# Altium PCB hazi_kiindulas.PcbDoc
Units mil, origin at the board's own origin, x right, y up, seen from the top; angles counter-clockwise.
Board outline 3628.74 x 2378.74 mil, 2 copper layers (Top Layer, Bottom Layer); 33 components, 42 nets, 239 pads, 45 vias.
Unrouted connection lines stored in the file: 1.
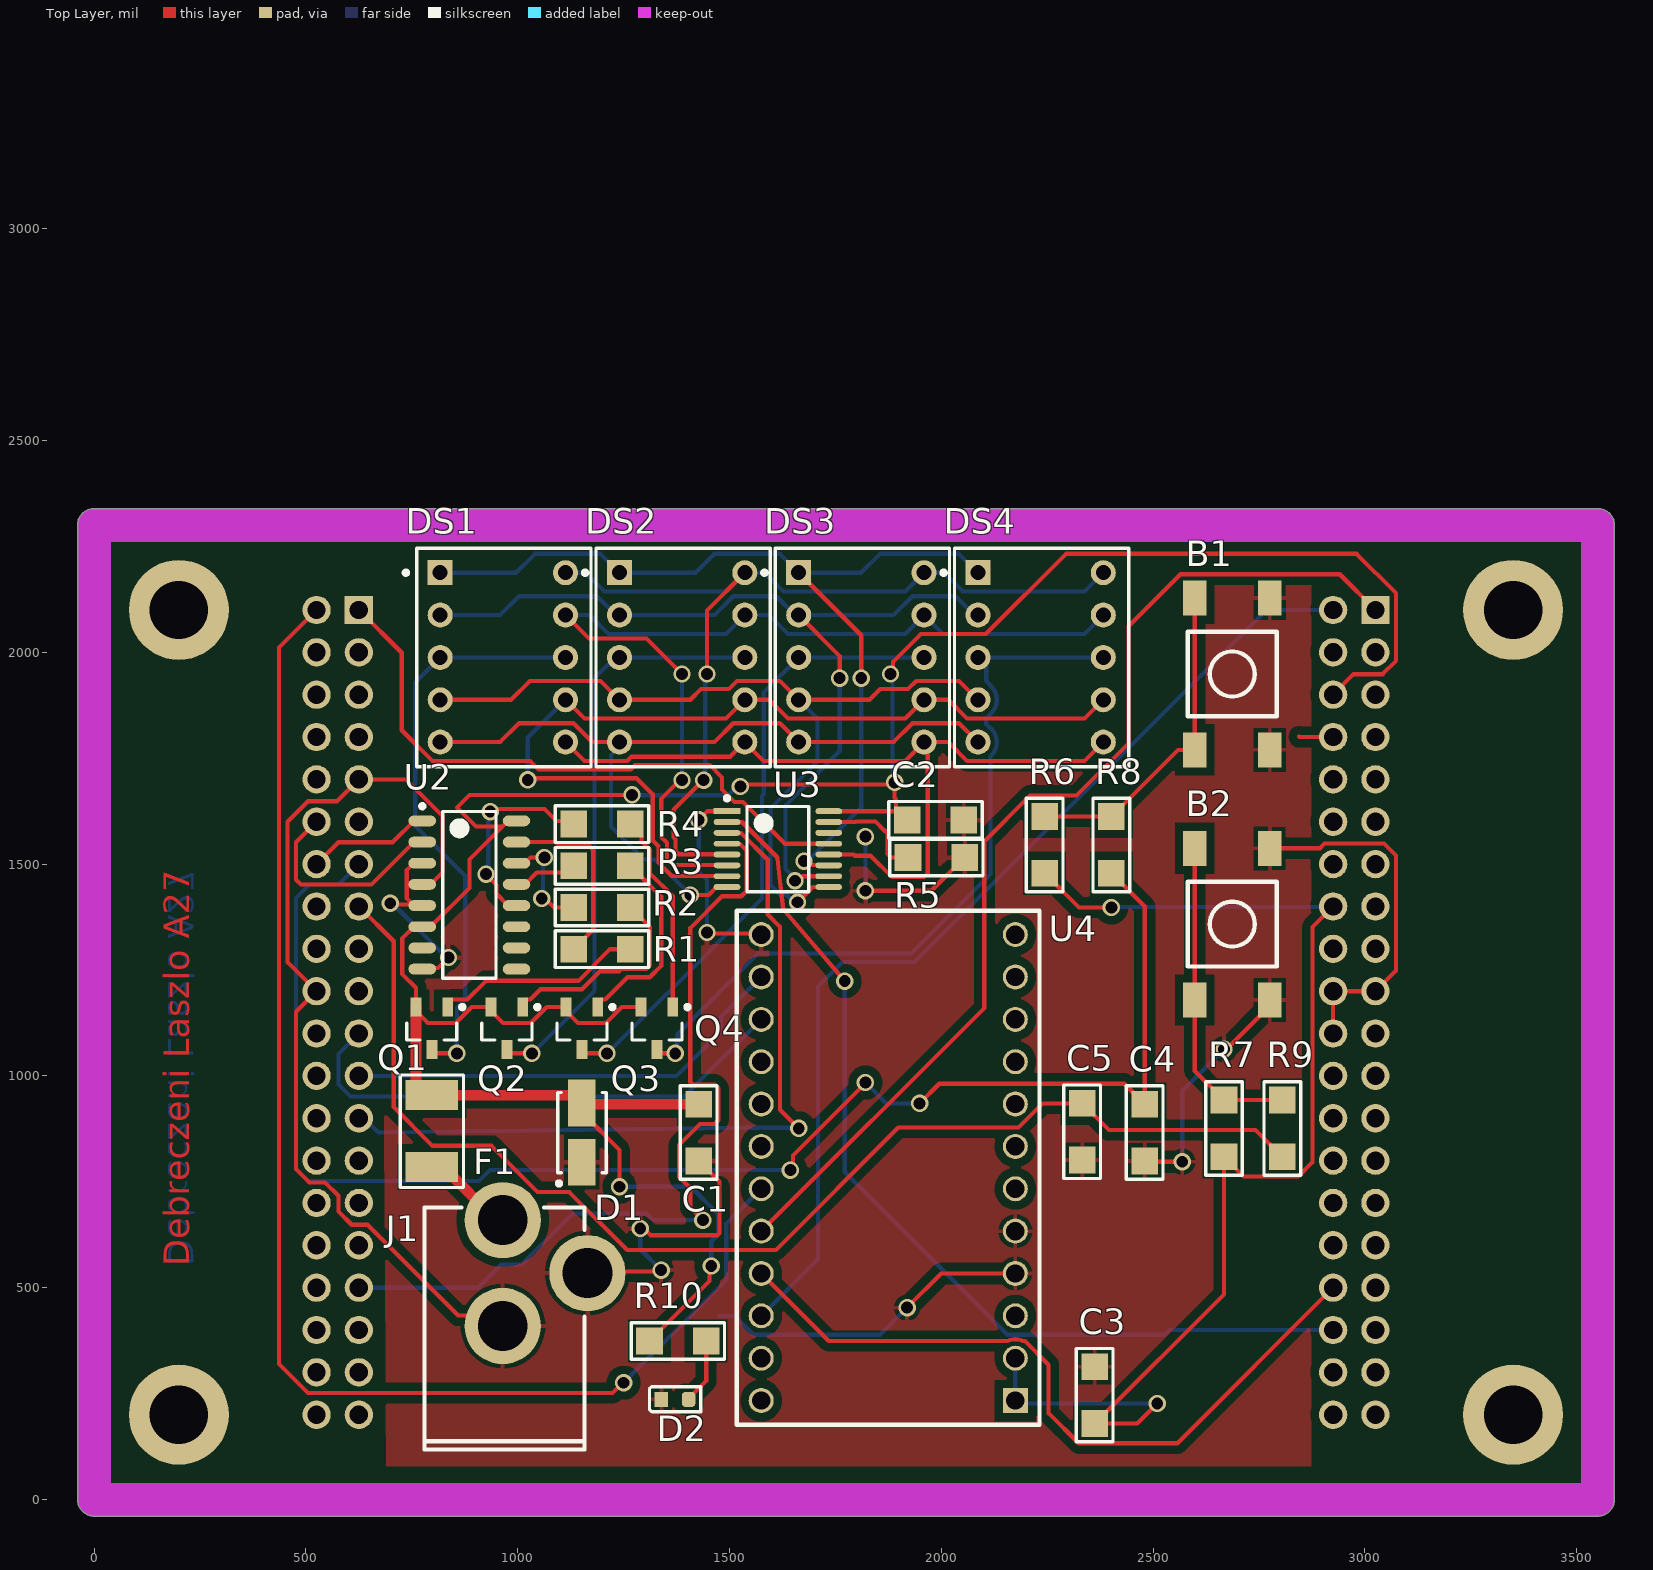
[diagram p0: Top Layer view]
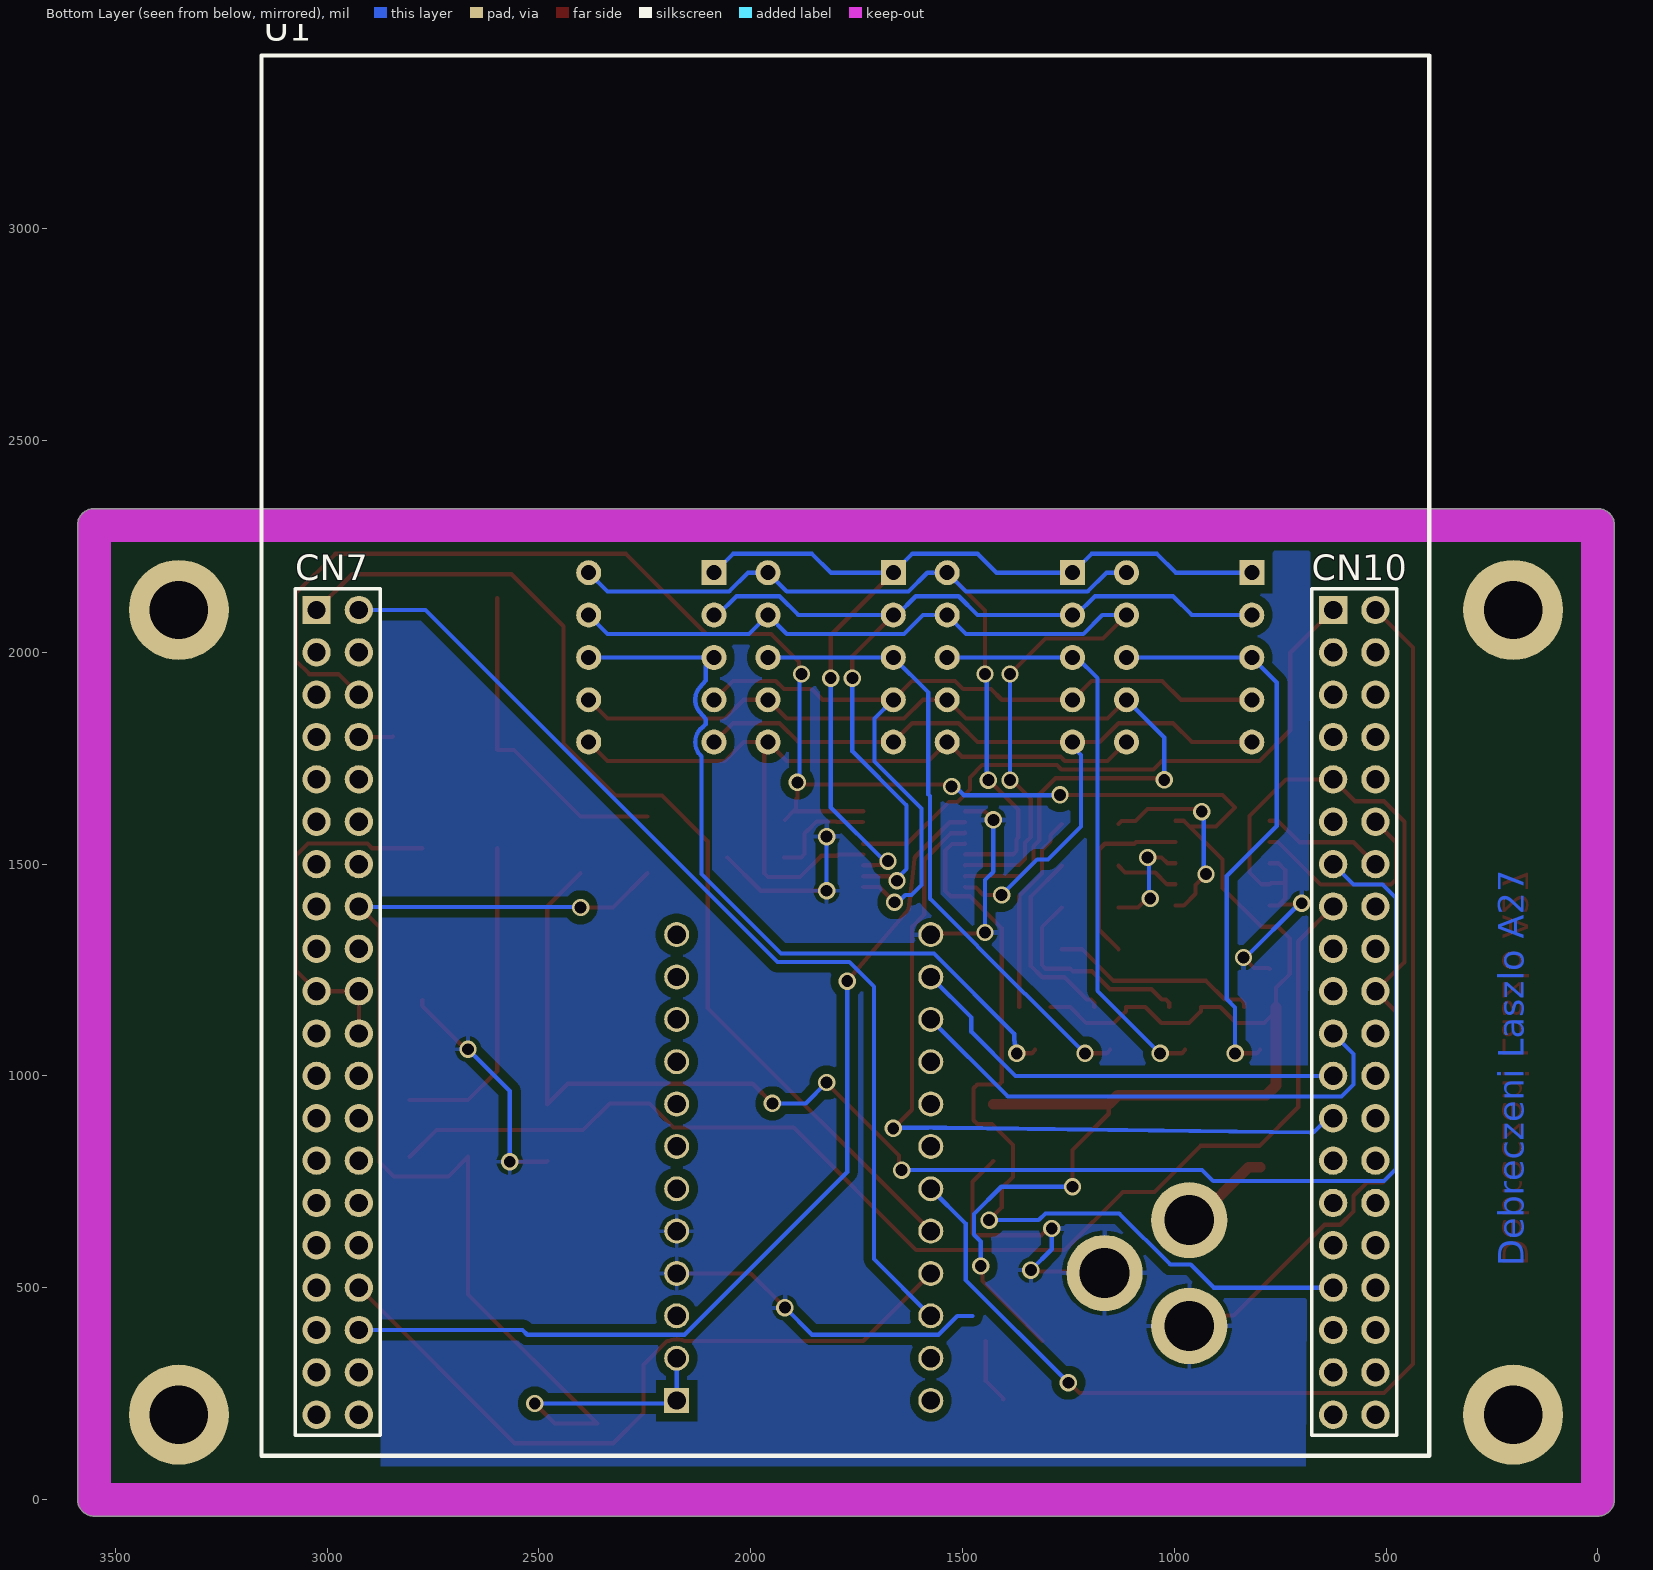
[diagram p1: Bottom Layer view, seen from below]
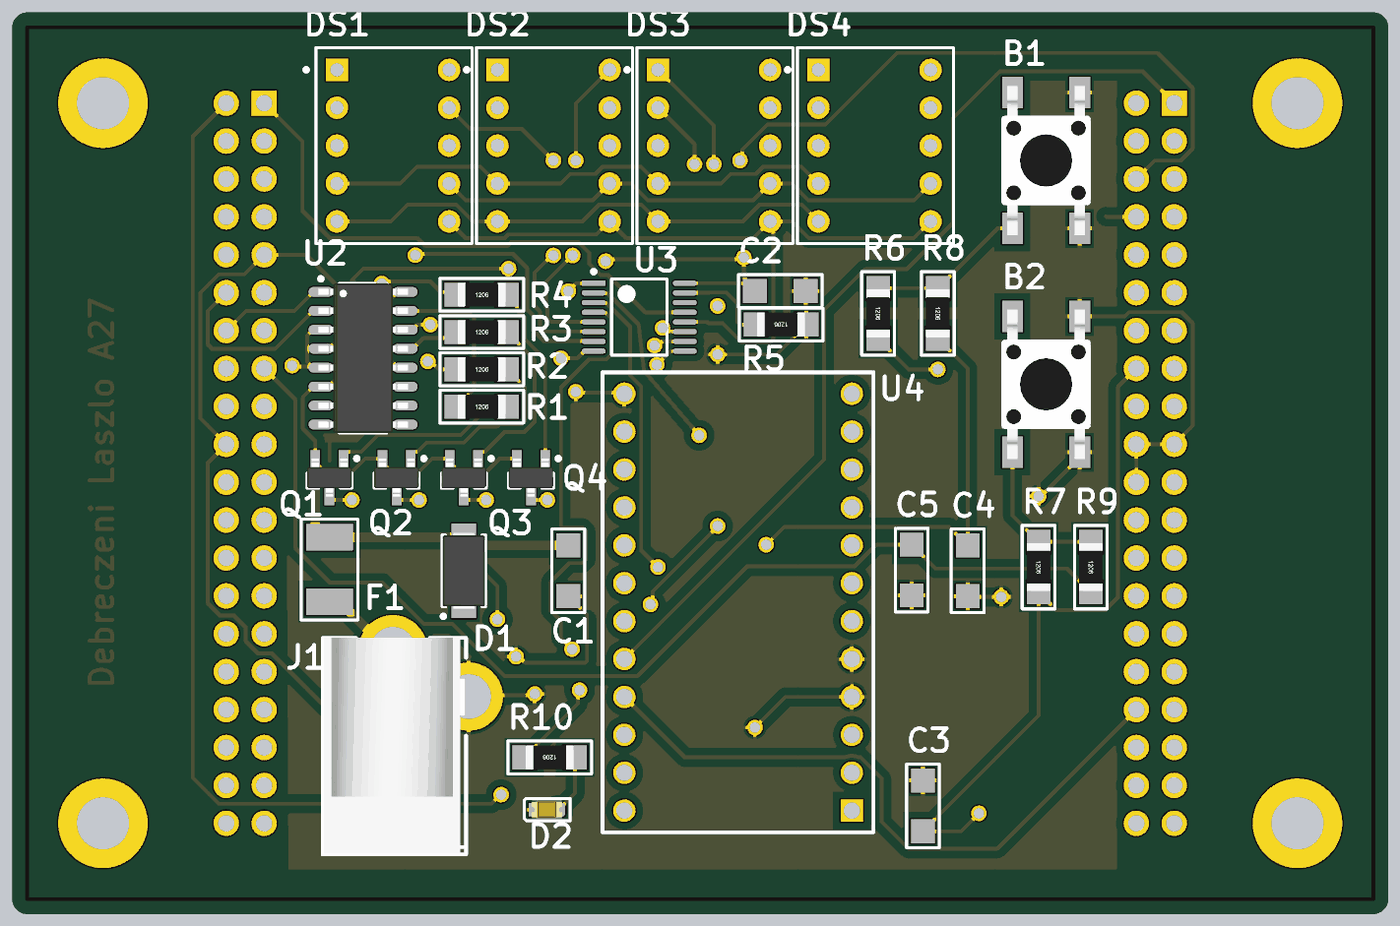
[diagram p2: 3D render of the assembled board from above, using the file's embedded part models]

## Layer stack, top to bottom
Top Solder: solder mask 0.4, Solder Resist, Dk 3.5
Top Layer: signal copper 1.4
Dielectric 1: dielectric 12.6, FR-4, Dk 4.8
Bottom Layer: signal copper 1.4
Bottom Solder: solder mask 0.4, Solder Resist, Dk 3.5

## Board outline
-39.37,2300 cw(c0,2300) 0,2339.37 3550,2339.37 cw(c3550,2300) 3589.37,2300 3589.37,0 cw(c3550,0) 3550,-39.37 0,-39.37 cw(c0,0) -39.37,0

## Design rules (kind name [scope] priority, off if disabled: settings)
Clearance [All] p1: gap=10 ignorepadtopadclearanceinfootprint=FALSE except(20: Arc-Poly Track-Poly SMDPad-Poly THPad-Poly Via-Poly Fill-Poly Poly-Poly)
HoleSize [IsVia] p1: absolutevalues=TRUE maxlimit=196.85 minlimit=28 maxpercent=80.000 minpercent=20.000
PolygonConnect [All] p1: connectstyle=Relief reliefconductorwidth=10 reliefentries=4 polygonreliefangle="90 Angle" airgapwidth=10
RoutingVias [All] p1: holewidth=28 width=41 viastyle="Through Hole" minholewidth=28 minwidth=41 maxholewidth=28 maxwidth=41
SolderMaskExpansion [All] p1: expansion=4 istentingtop=FALSE
UnRoutedNet [All] p1: checkbadconnections=TRUE
Width [All] p1: maxlimit=100 minlimit=10 preferedwidth=10
28 further rules are at their usual default settings.

## Classes and differential pairs
component class Pushbuttons: B1 B2 C4 C5 R6 R7 R8 R9
component class Power: D1 D2 F1 J1 R10
component class Acceleration_module: C3 U4
component class 7segment: C1 C2 DS1 DS2 DS3 DS4 Q1 Q2 Q3 Q4 R1 R2 R3 R4 R5 U2 U3
component class Nucleo: U1

## Components (designator, comment, footprint, x,y, rotation, side; value= is the part's Value field where it differs from the comment)
B1 "Button" FP_BTN_SMD 2687.01,1948.82 r0 top
B2 "Button" FP_BTN_SMD 2687.01,1358.27 r0 top
C1 "100nF" FP_1206_CAP_125 1427.17,866.14 r90 top
C2 "100nF" FP_1206_CAP_125 1986.22,1604.33 r180 top
C3 "100nF" FP_1206_CAP_125 2362.2,246.06 r270 top
C4 "100nF" FP_1206_CAP_125 2480.31,866.14 r90 top
C5 "100nF" FP_1206_CAP_125 2332.68,868.11 r90 top
D1 "Unidir suppressor diode" DIOM4426X23M 1151.57,866.14 r90 top
D2 "LED" FP_0805_LED_RED 1371.06,236.22 r180 top
DS1 "7SEG Red-CA" FP_7SEG 964.57,1988.19 r0 top
DS2 "7SEG Red-CA" FP_7SEG 1387.8,1988.19 r0 top
DS3 "7SEG Red-CA" FP_7SEG 1811.02,1988.19 r0 top
DS4 "7SEG Red-CA" FP_7SEG 2234.25,1988.19 r0 top
F1 "Fuse" FP_MULTIFUSE 797.24,784.72 r90 top
J1 "2.xmm" FP_DC_TAP_ANYA 964.57,659.45 r180 top
Q1 "BC807-25" SOT95P240X115-3M 797.24,1112.2 r270 top
Q2 "BC807-25" SOT95P240X115-3M 974.41,1112.2 r270 top
Q3 "BC807-25" SOT95P240X115-3M 1151.57,1112.2 r270 top
Q4 "BC807-25" SOT95P240X115-3M 1328.74,1112.2 r270 top
R1 "10K" FP_1206_RES 1198.82,1299.21 r0 top
R2 "10K" FP_1206_RES 1198.82,1397.64 r0 top
R3 "10K" FP_1206_RES 1198.82,1496.06 r0 top
R4 "10K" FP_1206_RES 1198.82,1594.49 r0 top
R5 "1K" FP_1206_RES 1988.19,1515.75 r180 top
R6 "100K" FP_1206_RES 2244.09,1545.28 r270 top
R7 "100K" FP_1206_RES 2667.32,875.98 r270 top
R8 "10K" FP_1206_RES 2401.57,1545.28 r270 top
R9 "10K" FP_1206_RES 2805.12,875.98 r270 top
R10 "510R" FP_1206_RES 1377.95,374.02 r180 top
U1 "NUCLEO-F446RE" FP_NUCLEO-64 3025,2100 r180 bottom locked
U2 "SN74HCT138DR" SOIC127P600X175-16M 885.83,1427.17 r0 top
U3 "STP08CP05TTR" TSOP65P640X120-16M 1614.17,1535.43 r0 top
U4 "MKI160V1" FP_DIL24 2174.8,233.46 r0 top

## Footprints (in the part's own frame and the unit in brackets; to place one, negate y for a bottom-side part, rotate by r counter-clockwise, add the part's x,y. Pads: shape width x height; smd on the part's side, far side on the other; paste and mask are expansions set on the pad)
DIOM4426X23M [mm] "Molded Diode, 2-Leads, Body 4,40x2,62mm, IPC Low Density"
  rect 2.8x1.65 smd: 1(-1.775,0) 2(1.775,0)
  silkscreen extent -3.17,-1.45 2.4,1.5, body extent -2.6,-1.42 2.6,1.42, height 2.3
FP_7SEG [mm] "LED, 7-Segment Display, 7.62 mm, RHD; 10 Leads; Row Space 5.08 mm; Pitch 2.54 mm"
  rect 1.5x1.5 hole 0.9: 1(-3.75,5.075)
  round 1.5 hole 0.9: 2(-3.75,2.535) 3(-3.75,-0.005) 4(-3.75,-2.545) 5(-3.75,-5.085) 6(3.765,-5.085) 7(3.765,-2.545) 8(3.765,-0.005) 9(3.765,2.535) 10(3.765,5.075)
  silkscreen extent -5.93,-6.56 5.29,6.54, body extent -5.16,-6.56 5.29,6.54, height 6.34
FP_0805_LED_RED [mm] "0805 méretű piros LED"
  rrect50% 0.8x0.9 smd: A(-0.825,0)
  rect 0.8x0.9 smd: K(0.825,0)
  silkscreen extent -1.55,-0.75 1.53,0.75, body extent -1,-0.62 1.02,0.62, height 1.1
FP_1206_CAP_125 [mm] "1206 kapacitás 1.25 mm"
  rect 1.6x1.6 smd: 1(-1.7,0) 2(1.7,0)
  silkscreen extent -2.8,-1.1 2.8,1.1, body extent -1.52,-0.79 1.58,0.79, height 1.25
FP_1206_RES [mm] "1206 ellenállás"
  rect 1.6x1.6 smd: 1(-1.7,0) 2(1.7,0)
  silkscreen extent -2.8,-1.1 2.8,1.1, body extent -1.6,-0.8 1.6,0.8, height 0.62
FP_BTN_SMD [mm] "SMD Push Button 6x6mm"
  rect 1.4x2.1 smd: 1(2.25,4.55) 2(2.25,-4.55) 3(-2.25,4.55) 4(-2.25,-4.55)
  silkscreen extent -2.67,-2.54 2.67,2.54, body extent -3,-5 3,5, height 5.1
FP_DC_TAP_ANYA [mil] "DC HEBA25 TÁPFESZÜLTSÉG ALJZAT ZÁRT, NYÁKBA 90°"
  round 180 hole 118: 1(0,0) 2(0,250) 3(-200,125)
  silkscreen extent -193,-30 185,541, body extent -190,-31 183,539, height 440
FP_DIL24 [mm] "DIL24"
  rect 1.5x1.5 hole 1.1: 1(0,0)
  round 1.5 hole 1.1: 2(0,2.54) 3(0,5.08) 4(0,7.62) 5(0,10.16) 6(0,12.7) 7(0,15.24) 8(0,17.78) 9(0,20.32) 10(0,22.86) 11(0,25.4) 12(0,27.94) 13(-15.24,27.94) 14(-15.24,25.4) 15(-15.24,22.86) 16(-15.24,20.32) 17(-15.24,17.78) 18(-15.24,15.24) 19(-15.24,12.7) 20(-15.24,10.16) 21(-15.24,7.62) 22(-15.24,5.08) 23(-15.24,2.54) 24(-15.24,0)
  silkscreen extent -16.7,-1.45 1.45,29.38, body extent -16.52,-1.28 1.28,29.21, height 4.86
FP_MULTIFUSE [mm] "POLYFUSE SMD 1812"
  rect 1.78x3.15 smd: 1(0,0) 2(4.318,0)
  silkscreen extent -1.22,-1.9 5.53,1.9, body extent -0.12,-1.71 4.57,1.71, height 1
FP_NUCLEO-64 [mm]
  round 1.7 hole 1.1: 0(0,-48.26) 0(2.54,-48.26) 0(60.96,-48.26) 0(63.5,-48.26) 2(2.54,0) 3(0,-2.54) 4(2.54,-2.54) 5(0,-5.08) 6(2.54,-5.08) 7(0,-7.62) 8(2.54,-7.62) 9(0,-10.16) 10(2.54,-10.16) 11(0,-12.7) 12(2.54,-12.7) 13(0,-15.24) 14(2.54,-15.24) 15(0,-17.78) 16(2.54,-17.78) 17(0,-20.32) 18(2.54,-20.32) 19(0,-22.86) 20(2.54,-22.86) 21(0,-25.4) 22(2.54,-25.4) 23(0,-27.94) 24(2.54,-27.94) 25(0,-30.48) 26(2.54,-30.48) 27(0,-33.02) 28(2.54,-33.02) 29(0,-35.56) 30(2.54,-35.56) 31(0,-38.1) 32(2.54,-38.1) 33(0,-40.64) 34(2.54,-40.64) 35(0,-43.18) 36(2.54,-43.18) 37(0,-45.72) 38(2.54,-45.72) 40(63.5,0) 41(60.96,-2.54) 42(63.5,-2.54) 43(60.96,-5.08) 44(63.5,-5.08) 45(60.96,-7.62) 46(63.5,-7.62) 47(60.96,-10.16) 48(63.5,-10.16) 49(60.96,-12.7) 50(63.5,-12.7) 51(60.96,-15.24) 52(63.5,-15.24) 53(60.96,-17.78) 54(63.5,-17.78) 55(60.96,-20.32) 56(63.5,-20.32) 57(60.96,-22.86) 58(63.5,-22.86) 59(60.96,-25.4) 60(63.5,-25.4) 61(60.96,-27.94) 62(63.5,-27.94) 63(60.96,-30.48) 64(63.5,-30.48) 65(60.96,-33.02) 66(63.5,-33.02) 67(60.96,-35.56) 68(63.5,-35.56) 69(60.96,-38.1) 70(63.5,-38.1) 71(60.96,-40.64) 72(63.5,-40.64) 73(60.96,-43.18) 74(63.5,-43.18) 75(60.96,-45.72) 76(63.5,-45.72)
  rect 1.7x1.7 hole 1.1: 1(0,0) 39(60.96,0)
  silkscreen extent -3.3,-50.72 66.72,33.25, body extent -3.3,-50.72 66.72,33.25, height 11
SOIC127P600X175-16M [mm] "SOIC, 16-Leads, Body 9,90x3,90mm, Pitch 1,27mm, IPC Low Density"
  oval 1.65x0.65 smd: 1(-2.825,4.445) 2(-2.825,3.175) 3(-2.825,1.905) 4(-2.825,0.635) 5(-2.825,-0.635) 6(-2.825,-1.905) 7(-2.825,-3.175) 8(-2.825,-4.445) 9(2.825,-4.445) 10(2.825,-3.175) 11(2.825,-1.905) 12(2.825,-0.635) 13(2.825,0.635) 14(2.825,1.905) 15(2.825,3.175) 16(2.825,4.445)
  silkscreen extent -2.95,-5 1.6,5.44, body extent -3,-5 3,5, height 1.75
SOT95P240X115-3M [mm] "SOT23, 3-Leads, Body 2,90x2,40mm, Pitch 0,95mm, IPC Low Density"
  rect 1.15x0.65 smd: 1(-1.275,0.95) 2(-1.275,-0.95) 3(1.275,0)
  silkscreen extent -1.4,-1.5 0.7,1.95, body extent -1.28,-1.5 1.28,1.5, height 1.15
TSOP65P640X120-16M [mm] "TSOP, 16-Leads, Body 5,00x4,40mm, Pitch 0,65mm, IPC Low Density"
  rect 1.6x0.35 smd: 1(-3.05,2.275)
  oval 1.6x0.35 smd: 2(-3.05,1.625) 3(-3.05,0.975) 4(-3.05,0.325) 5(-3.05,-0.325) 6(-3.05,-0.975) 7(-3.05,-1.625) 8(-3.05,-2.275) 9(3.05,-2.275) 10(3.05,-1.625) 11(3.05,-0.975) 12(3.05,-0.325) 13(3.05,0.325) 14(3.05,0.975) 15(3.05,1.625) 16(3.05,2.275)
  silkscreen extent -3.17,-2.55 1.85,3.17, body extent -2.25,-2.55 2.25,2.55, height 1.2

## Part data
B1 B2: library part "Button 4P", "Push button", Name="4P Pushbutton", Reference=45-05-43, Supplier=Lomex
C1 C2 C3 C4 C5: library part CAP, "Capacitor", Tolerance=10%, Voltage=50V, Name="100nF 1206 Capacitor", Reference=82-14-64, Supplier=Lomex
D1: library part "Suppressor diode", "Suppressor diode for transients", Name="Suppressor diode", Reference=96-03-85, Supplier=Lomex
D2: "Typical RED GaAs LED", I_max="30 mA", Name="Green LED", Reference=95-02-77, Supplier=Lomex, U_fw="5 V"
DS1 DS2 DS3 DS4: "7-Segment Display: CA, RH DP", Colour="High Efficiency Red (HER)", ComponentLink1Description="Manufacturer Link", ComponentLink1URL=http://www.agilent.com/, DatasheetVersion=19-Feb-2002, LatestRevisionDate=17-Dec-2003, LatestRevisionNote="Schematic revised, PCB Footprint replaced.", MinimumIntensity="360 ucd", Name=FYS-3911BUHR-21, Note="IF = 5 mA", PackageDescription="LED, 7-Segment Display, 7.62 mm, RHD; 10 Leads; Row Space 5.08 mm; Pitch 2.54 mm", PackageReference=A, PackageVersion=11-Feb-2002, Published=8-Jun-2000, Publisher="Altium Limited", Reference=35-03-94, Supplier=Lomex
J1: library part DC_TAP_ANYA, "2.xmm DC HEBA25 TÁPFESZÜLTSÉG ALJZAT ZÁRT, NYÁKBA 90°", Name="TÁP DC ANYA 5.5/2.1/9.5mm DCS-5521-5", Reference=43-07-67, Supplier=Lomex
Q1 Q2 Q3 Q4: "PNP General-purpose Transistor", Name=BC807-25, Reference=86-05-63, Supplier=Lomex
R1 R2 R3 R4 R5 R6 R7 R8 R9 R10: library part RES, "Resistor", Power=0.25W, Tolerance=5%, Supplier=Lomex
  R1 R2 R3 R4 R8 R9: Name="10K 1206 Resistor", Reference=81-11-59
  R5: Name="1K 1206 Resistor", Reference=81-11-47
  R6 R7: Name="100K 1206 resistor", Reference=81-11-71
  R10: Name="1206 Resistor", Reference=81-12-04
U2: "3-line to 8-line decoder", Name=SN74HCT138DR, Reference=87-06-49, Supplier=Lomex
U3: "Low voltage, low current power 8-bit shift register", Name=STP08CP05TTR, Supplier="ST, Tanszéki forrás"
U4: "LSM6DS3 inertial module adapter", Name="MKI160V1 LSM6DS3 inertial module adapter", Reference=511-STEVAL-MKI160V1, Supplier=Mouser
F1: Name="SMD Fuse", Reference=44-04-71, Supplier=Lomex
U1: Name="Nucleo F446RE", Reference=NUCLEO, Supplier=Tanszék

## Free pads (board coordinates)
  round 236.22 hole 137.8: ""(200,200) ""(200,2100) ""(3350,200) ""(3350,2100)

## Via types
v1: diameter 41, hole 28, Top Layer to Bottom Layer, 45 vias

## Nets (pads, with @x,y where several pads share a name; then routed paths per layer and width w, separated by ;. In a path a pad name is that pad's centre, name@x,y a point inside that pad or via, vN(x,y) a via of type N, cw(c..) or ccw(c..) an arc to the next point about the centre after c; other vN are vias at no path point)
+3.3V: C3.2 R6.2 R7.2 U1.16 U4.1 U4.2 | length 2943
  Top Layer w10: R6.2 2324.8,1397.64 v1(2401.57,1397.64) ; v1(2509.84,226.38) 2462.6,179.13 C3.2 2667.32,484.25 R7.2 2713.82,762.56 2842.83,762.56 2876.54,796.27 2876.54,1351.54 U1.16
  Bottom Layer w10: U4.2 U4.1 2181.89,226.38 v1(2509.84,226.38) ; v1(2401.57,1397.64) 2402.76,1398.82 2923.82,1398.82 U1.16
+5V: C1.2 C2.2 D1.2 F1.2 Q1.2 Q2.2 Q3.2 Q4.2 R10.2 U1.6 U2.6 U2.16 U3.16 | length 6369.1
  Top Layer w10: Q1.2@759.84,1152.56 767.64,1144.76 767.73,1144.76 787.73,1124.76 853.65,1124.76 891.29,1162.4 Q2.2 937.01,1152.56 944.8,1144.76 944.89,1144.76 964.89,1124.76 1030.82,1124.76 1068.46,1162.4 Q3.2 1114.17,1152.56 1121.97,1144.76 1122.06,1144.76 1142.06,1124.76 1207.98,1124.76 1245.62,1162.4 Q4.2 ; Q1.2 759.84,1207.94 727.13,1240.65 727.13,1324.37 754.92,1352.17 U2.6 794.29,1352.17 885.83,1443.7 885.83,1510.63 977.36,1602.17 U2.16 ; 959.49,1588.52 901.64,1588.52 856.3,1633.86 885.83,1663.39 v1(1269.69,1663.39) ; D1.2@1154.53,933.07 1154.53,910.43 1240.16,824.8 v1(1240.16,738.19) ; R10.2 1452.69,515.68 1452.69,547.18 v1(1456.69,551.18) ; v1(1525.59,1683.07) 1530.51,1687.99 1884.84,1687.99 v1(1889.76,1692.91) 1889.76,1656.23 1892.8,1653.19 1892.8,1630.83 C2.2@1898.62,1625 ; U3.16 C2.2@1898.62,1625 ; v1(1879.92,1948.82) 1885.85,1954.75 1885.85,1977.56 1951.75,2043.46 2105.06,2043.46 2294.11,2232.52 2980.62,2232.52 3073.46,2139.68 3073.46,1979.93 3042,1948.46 2973.46,1948.46 U1.6 ; C2.2 C2.2@1898.62,1625
  Top Layer w25: Q1.2 759.84,1152.56 759.84,977.26 782.38,954.72 F1.2 1132.87,954.72 D1.2 1154.53,933.07 C1.2
  Bottom Layer w10: v1(1240.16,738.19) 1408.47,738.19 1472.51,674.15 1472.51,624.77 1456.69,608.95 v1(1456.69,551.18) ; v1(1269.69,1663.39) 1270.4,1662.67 1496.8,1662.67 1517.2,1683.07 v1(1525.59,1683.07) ; v1(1879.92,1948.82) 1884.84,1943.9 1884.84,1697.83 v1(1889.76,1692.91)
D1: DS1.10 DS2.10 DS3.10 DS4.10 U3.5 | length 2234.2
  Top Layer w10: v1(1438.8,1698.17) 1438,1698.17 1368.11,1628.28 1368.11,1562.76 1372.24,1558.62 1372.24,1531.3 1380.18,1523.36 1493.37,1523.36 U3.5 ; v1(1446.85,1948.82) 1446.85,2098.82 DS2.10
  Bottom Layer w10: DS1.10 1159.89,2187.99 1204.42,2143.46 1491.5,2143.46 DS2.10 1583.12,2187.99 1627.64,2143.46 1914.72,2143.46 DS3.10 2006.35,2187.99 2050.87,2143.46 2337.95,2143.46 DS4.10 ; v1(1438.8,1698.17) 1442.82,1702.2 1442.82,1944.79 v1(1446.85,1948.82)
D2: DS1.9 DS2.9 DS3.9 DS4.9 U3.6 | length 2326.6
  Top Layer w10: DS1.9 1168.27,2032.52 1304.09,2032.52 v1(1387.8,1948.82) ; v1(1387.8,1698.17) 1383.21,1698.17 1338.58,1653.54 1338.58,1564 1352.24,1550.34 1352.24,1511.93 1366.4,1497.77 1493.37,1497.77 U3.6
  Bottom Layer w10: DS1.9 1170.07,2087.99 1214.6,2043.46 1491.5,2043.46 DS2.9 1593.3,2087.99 1637.83,2043.46 1914.72,2043.46 DS3.9 2003.78,2043.46 2337.95,2043.46 DS4.9 ; v1(1387.8,1698.17) v1(1387.8,1948.82)
D3: DS1.7 DS2.7 DS3.7 DS4.7 U3.7 | length 2260.6
  Top Layer w10: v1(1023.62,1698.89) 1027.49,1702.76 1280.52,1702.76 1318.58,1664.69 1318.58,1555.72 1332.24,1542.06 1332.24,1503.64 1363.71,1472.18 1493.37,1472.18 U3.7 ; DS1.7 1157.32,1843.46 1491.5,1843.46 DS2.7 1593.3,1887.99 1637.83,1843.46 1914.72,1843.46 DS3.7 2016.53,1887.99 2061.06,1843.46 2337.95,1843.46 DS4.7
  Bottom Layer w10: v1(1023.62,1698.89) 1023.62,1798.82 DS1.7
D4: DS1.5 DS2.5 DS3.5 DS4.5 U3.8 | length 1936
  Top Layer w10: DS1.5 958.46,1787.99 1002.99,1832.52 1131.24,1832.52 1175.77,1787.99 DS2.5 1464.31,1787.99 1508.84,1832.52 1618.86,1832.52 DS3.5 1887.54,1787.99 1932.06,1832.52 2042.09,1832.52 DS4.5 ; v1(1407.48,1427.17) 1450.79,1427.17 1468.25,1444.63 1492.86,1444.63 U3.8
  Bottom Layer w10: DS2.5 1240.16,1777.29 1220.47,1757.61 1220.47,1588.79 1298.32,1510.94 1323.7,1510.94 v1(1407.48,1427.17)
D5: DS1.4 DS2.4 DS3.4 DS4.4 U3.9 | length 2051.1
  Top Layer w10: DS1.4 984.02,1887.99 1028.54,1932.52 1195.63,1932.52 DS2.4 1407.24,1887.99 1432.57,1913.32 1498.38,1913.32 1517.58,1932.52 1618.86,1932.52 DS3.4 1830.47,1887.99 1855.8,1913.32 1921.61,1913.32 1940.81,1932.52 2042.09,1932.52 DS4.4 ; v1(1660.65,1409.94) 1696.57,1445.87 U3.9
  Bottom Layer w10: v1(1660.65,1409.94) 1652.26,1409.94 1635.07,1427.13 1620.56,1427.13 1596.93,1450.76 1596.93,1631.52 1707.91,1742.51 1707.91,1843.46 DS3.4
D6: DS1.2 DS2.2 DS3.2 DS4.2 U3.10 | length 2194.7
  Top Layer w10: v1(1654.43,1460.56) 1662.82,1460.56 1673.66,1471.4 1732.86,1471.4 1733.53,1470.73 U3.10 ; DS3.2 1760.02,1991.35 v1(1760.02,1938.98)
  Bottom Layer w10: DS1.2 958.46,2087.99 1002.99,2132.52 1187.08,2132.52 1231.6,2087.99 1464.31,2087.99 1508.84,2132.52 1610.31,2132.52 1654.83,2087.99 DS3.2 1887.54,2087.99 1932.06,2132.52 2033.53,2132.52 2078.06,2087.99 DS4.2 ; v1(1654.43,1460.56) 1654.43,1466.76 1632.43,1488.76 1632.43,1638.74 1760.02,1766.33 v1(1760.02,1938.98)
D7: DS1.1 DS2.1 DS3.1 DS4.1 U3.11 | length 2279.9
  Top Layer w10: DS3.1 1811.02,2040.35 v1(1811.02,1938.98) ; v1@1681.48,1501.15 v1(1675.73,1506.9) 1684.12,1506.9 1693.25,1497.77 1733.53,1497.77 U3.11 U3.11@1708.62,1497.05
  Bottom Layer w10: DS1.1 996.28,2187.99 1040.81,2232.52 1195.63,2232.52 DS2.1 1419.51,2187.99 1464.04,2232.52 1618.86,2232.52 DS3.1 1810.54,2187.99 1855.07,2232.52 2042.09,2232.52 DS4.1 ; v1(1675.73,1506.9) 1684.07,1506.9 1811.02,1633.86 v1(1811.02,1938.98)
D8: DS1.6 DS2.6 DS3.6 DS4.6 U3.12 | length 1953.1
  Top Layer w10: DS1.6 1157.32,1743.46 1258.6,1743.46 1268.81,1753.67 1501.7,1753.67 DS2.6 1580.55,1743.46 1914.72,1743.46 DS3.6 ; U3.12 1793.3,1522.64 1796.32,1519.62 1833.18,1519.62 1883.55,1469.25 1958.97,1469.25 1967.76,1478.04 1967.76,1779.49 DS3.6 ; DS4.6 2337.95,1743.46 2061.06,1743.46 2016.53,1787.99 DS3.6
GND: B1.1 B1.2 B2.1 B2.2 C1.1 C2.1 C3.1 C4.1 C5.1 D1.1 D2.K J1.2 J1.3 R5.1 U1.8 U1.19 U1.20 U1.22 U1.47 U1.58 U2.3 U2.4 U2.5 U2.8 U3.1 U4.4 U4.5 U4.13 | length 6564.3
  Top Layer w10: v1(698.82,1407.48) 701.48,1404.82 U2.5@750.69,1404.82 ; U2.8 776.87,1254.43 811.51,1254.43 v1(836.61,1279.53) ; U2.5 753.35,1402.17 U2.5@750.69,1404.82 ; U2.3 754.13,1502.17 738.19,1486.22 738.19,1458.02 ; J1.2 J1.2@960.63,413.39 ; J1.2@972.54,413.39 J1.2@960.63,413.39 ; J1.3@1097.54,538.39 J1.3@1135.04,538.39 ; J1.3 1168.01,537.89 1335.14,537.89 v1(1338.58,541.34) ; v1(1289.37,639.76) 1297.76,639.76 1313.57,623.95 1471.69,623.95 1476.38,628.64 1476.38,750 C1.1 ; v1(1427.17,1604.33) 1447.83,1625 U3.1 ; v1(1446.85,1338.58) 1449.41,1336.02 1572.24,1336.02 U4.13 ; v1@1812.48,1564.96 v1(1820.87,1564.96) ; v1(1820.87,1437.01) 1976.38,1437.01 R5.1 ; v1(1919.29,452.76) 2000,533.46 U4.4 ; C4.1 2482.28,797.24 v1(2568.9,797.24) ; v1(2667.32,1062.99) 2673.23,1062.99 2775.59,1165.35 B2.2 ; B2.1 2893.86,1537.4 2904.93,1548.46 3045.07,1548.46 3073.46,1520.07 3073.46,1248.46 U1.19 U1.20 U1.22 ; 2844.49,1801.18 2845.67,1800 U1.8 ; 738.19,1458.02 738.19,1418.69 749.73,1407.16 749.73,1405.79 U2.5@750.69,1404.82 ; 738.19,1458.02 741.06,1455.15 771.62,1455.15 U2.4 794.29,1452.17 822.09,1479.96 822.09,1613.68 735.77,1700 U1.47 573.46,1648.46 504.93,1648.46 456.54,1600.07 456.54,1268.46 U1.58 476.54,1151.54 476.54,779.93 508,748.46 545.07,748.46 576.54,717 576.54,679.93 608,648.46 645.07,648.46 859.57,433.97 940.04,433.97 J1.2@960.63,413.39
  Bottom Layer w10: v1(698.82,1407.48) 703.74,1407.48 831.69,1279.53 v1(836.61,1279.53) ; v1(1289.37,639.76) 1289.37,590.55 v1(1338.58,541.34) ; v1(1427.17,1604.33) 1427.17,1482.03 1446.85,1462.34 v1(1446.85,1338.58) ; 1476.38,433.07 1512.23,433.07 1556.36,388.94 1855.47,388.94 v1(1919.29,452.76) ; v1(1820.87,1437.01) v1(1820.87,1564.96) ; v1(2568.9,797.24) 2568.9,964.57 v1(2667.32,1062.99)
NetB1_3: B1.3 B1.4 R6.1 R8.1 | length 777.8
  Top Layer w10: R6.1 R8.1 2559.06,1769.68 B1.4 B1.3
NetB2_3: B2.3 B2.4 R7.1 R9.1 | length 760.8
  Top Layer w10: B2.3 B2.4 2598.43,1011.81 R7.1 R9.1
NetC4_2: C4.2 R8.2 U1.51 | length 3588.9
  Top Layer w10: v1(1643.7,777.56) 1649.63,783.49 1649.63,812.03 1820.87,983.26 v1(1820.87,984.25) ; v1(1948.82,935.04) 1995.32,981.54 2431.85,981.54 C4.2 2480.31,1399.61 R8.2
  Bottom Layer w10: U1.51 576.54,1451.54 508,1451.54 476.54,1420.07 476.54,779.93 504.93,751.54 908.16,751.54 934.62,777.99 1643.27,777.99 v1(1643.7,777.56) ; v1(1820.87,984.25) 1870.08,935.04 v1(1948.82,935.04)
NetC5_2: C5.2 R9.2 U1.53 | length 2940.8
  Top Layer w10: U1.53 707.13,1317.87 707.13,926.58 798.94,834.76 937.74,834.76 1046.37,726.14 1121.37,726.14 1258.57,588.94 1609.32,588.94 1898.38,877.99 2182.3,877.99 2239.35,935.04 C5.2 2395.67,872.05 2742.13,872.05 R9.2
NetD2_1: D2.A R10.1 | length 154.9
  Top Layer w10: D2.A 1403.54,238.19 1444.88,279.53 R10.1
NetDS1_3: DS1.3 DS1.8 Q1.3 | length 1375.6
  Top Layer w10: Q1.3 797.24,1060.94 805.04,1053.15 v1(856.3,1053.15)
  Bottom Layer w10: v1(856.3,1053.15) 856.3,1161.64 875.98,1181.33 875.98,1471.8 757.87,1589.91 757.87,1928.94 DS1.3 DS1.8
NetDS2_3: DS2.3 DS2.8 Q2.3 | length 1385.6
  Top Layer w10: Q2.3 974.41,1060.94 982.2,1053.15 v1(1033.46,1053.15)
  Bottom Layer w10: v1(1033.46,1053.15) 1181.1,1200.79 1181.1,1938.98 1230.12,1987.99 DS2.3 DS2.8
NetDS3_3: DS3.3 DS3.8 Q3.3 | length 1482.2
  Top Layer w10: Q3.3 1151.57,1060.94 1159.37,1053.15 v1(1210.63,1053.15)
  Bottom Layer w10: v1(1210.63,1053.15) 1351.06,1193.58 1352.05,1193.58 1576.93,1418.46 1576.93,1660.49 1580.55,1664.11 1580.55,1905.16 DS3.3 DS3.8
NetDS4_3: DS4.3 DS4.8 Q4.3 | length 1832.9
  Top Layer w10: Q4.3 1328.74,1060.94 1336.54,1053.15 v1(1371.98,1053.15)
  Bottom Layer w10: v1(1371.98,1053.15) 1377.95,1085.37 1377.95,1099.59 1567.3,1288.94 1928.7,1288.94 2116.14,1476.38 2116.14,1754.57 2117.2,1755.63 ccw(c2086.61,1787.99) 2112.27,1824.39 cw(c2118.13,1832.49) 2111.51,1824.99 2108.36,1828.14 2106.3,1830.25 2106.3,1833.97 2106.3,1842.25 2120.66,1859.3 ccw(c2086.61,1887.99) 2120.66,1916.69 2106.3,1933.73 2106.3,1968.31 2103.37,1971.24 DS4.3 DS4.8
NetF1_1: F1.1 J1.1 | length 219.2
  Top Layer w25: F1.1 824.21,784.72 949.49,659.45 J1.1
NetQ1_1: Q1.1 R1.2 | length 493.5
  Top Layer w10: Q1.1 834.65,1172.24 842.44,1180.04 880.65,1180.04 924.98,1224.37 1143.22,1224.37 1218.06,1299.21 R1.2
NetQ2_1: Q2.1 R2.2 | length 502.6
  Top Layer w10: Q2.1 1011.81,1172.24 1019.61,1180.04 1029.45,1180.04 1053.78,1204.37 1151.51,1204.37 1194.04,1246.9 1239.34,1246.9 1245.15,1252.72 1303.46,1252.72 1312.24,1261.5 1312.24,1351.14 R2.2
NetQ3_1: Q3.1 R3.2 | length 462.3
  Top Layer w10: Q3.1 1188.98,1172.24 1196.77,1180.04 1206.61,1180.04 1259.29,1232.72 1311.74,1232.72 1338.58,1259.56 1338.58,1423.23 R3.2
NetQ4_1: Q4.1 R4.2 | length 473.7
  Top Layer w10: R4.2 1292.24,1567.99 1292.24,1553.77 1312.24,1533.77 1312.24,1477.85 1366.14,1423.95 Q4.1
NetR1_1: R1.1 U2.15 | length 442.8
  Top Layer w10: U2.15 1090.01,1552.17 1094.18,1547.99 1164.17,1547.99 1178.39,1533.77 1178.39,1345.71 R1.1
NetR2_1: R2.1 U2.14 | length 255.1
  Top Layer w10: U2.14 1016.21,1502.17 1029.79,1515.75 v1(1062.99,1515.75) ; v1(1056.7,1418.8) 1064.23,1418.8 1085.39,1397.64 R2.1
  Bottom Layer w10: v1(1056.7,1418.8) 1059.85,1421.95 1059.85,1512.6 v1(1062.99,1515.75)
NetR3_1: R3.1 U2.13 | length 153
  Top Layer w10: U2.13 1016.73,1452.17 1044.81,1480.25 1116.07,1480.25 R3.1
NetR4_1: R4.1 U2.12 | length 481.2
  Top Layer w10: v1(925.2,1476.38) 925.2,1474.91 949.57,1450.54 949.57,1429.96 977.36,1402.17 U2.12 ; v1(935.04,1624.02) 940.97,1629.95 965.84,1629.95 1063.06,1629.96 1091.25,1601.77 1124.6,1601.77 R4.1
  Bottom Layer w10: v1(925.2,1476.38) 930.12,1481.3 930.12,1619.09 v1(935.04,1624.02)
NetR5_2: R5.2 U3.15 | length 250
  Top Layer w10: U3.15@1735.7,1599.41 1797.56,1599.41 1798.61,1600.46 1844.42,1600.46 1866.09,1578.79 1866.94,1578.79 1872.8,1572.93 1872.8,1523.57 1880.62,1515.75 R5.2
NetU1_1: U1.1 U4.20 | length 2520.4
  Top Layer w10: U4.20 2101.61,1160.28 2101.61,1553.93 2209.42,1661.74 2319.2,1661.74 2441.93,1784.47 2441.93,2061.56 2564.65,2184.29 2940.71,2184.29 U1.1
NetU1_2: U1.2 U4.22 | length 2417.3
  Bottom Layer w10: U4.22 1708.73,567.39 1708.73,1210.61 1767.06,1268.94 1936.99,1268.94 2768.05,2100 U1.2
NetU1_34: U1.34 U4.21 | length 1736.4
  Top Layer w10: U4.21 1731.32,376.94 1734.25,374.02 2156.42,374.02 cw(c2174.8,333.46) 2193.19,374.02 2197.22,374.02 2253.4,317.84 2253.4,203.73 2324.5,132.64 2557.64,132.64 U1.34
NetU1_36: U1.36 U3.2 | length 2266.9
  Top Layer w10: U3.2 1494.82,1598.69 1530.18,1598.69 1610.27,1518.6 ; 1610.28,1518.58 cw(c1603.19,1511.53) 1613.14,1512.59 ; 1613.14,1512.55 1618.93,1458.4 1626.9,1393.48 v1(1772.02,1223.69)
  Bottom Layer w10: v1(1772.02,1223.69) 1772.02,773.28 2156.36,388.93 2527.44,388.93 2538.51,400 U1.36
NetU1_39: U1.39 U3.13 | length 1470.3
  Top Layer w10: U1.39 725.97,1999.03 725.97,1815.97 798.49,1743.46 1029.25,1743.46 1049.25,1723.46 1266.89,1723.46 1277.09,1733.67 1453.5,1733.67 1482.53,1704.64 1482.53,1675.92 1511.57,1646.89 1531.8,1646.89 1630.47,1548.23 U3.13
NetU1_40: U1.40 U4.19 | length 3260.9
  Top Layer w10: U1.40 436.54,2011.54 436.54,319.93 504.93,251.54 1223.85,251.54 1247.91,275.59 v1(1250,275.59)
  Bottom Layer w10: v1(1250,275.59) 1492.51,518.1 1492.51,651.17 U4.19
NetU1_50: U1.50 U2.2 | length 501.5
  Top Layer w10: U1.50 476.54,1551.54 476.54,1463.14 488.14,1451.54 654.29,1451.54 754.92,1552.17 U2.2
NetU1_52: U1.52 U2.1 | length 291.9
  Top Layer w10: U1.52 576.54,1551.54 704.29,1551.54 754.92,1602.17 U2.1
NetU1_59: U1.59 U4.15 | length 1225.5
  Bottom Layer w10: U1.59 576.54,1051.54 576.54,979.93 604.93,951.54 1392.87,951.54 U4.15
NetU1_61: U1.61 U4.14 | length 1066.2
  Bottom Layer w10: U1.61 1375.01,1000 1479.04,1104.03 1479.04,1137.7 U4.14
NetU1_63: U1.63 U3.3 | length 1840.2
  Top Layer w10: U3.3 1494.82,1573.1 1527.48,1573.1 1590.27,1510.31 1590.27,1380.97 1619.33,1351.91 1619.33,920.04 v1(1663.39,875.98)
  Bottom Layer w10: U1.63 637.69,900 668.61,869.07 671.54,866.14 679.83,866.14 1538.74,877.52 1538.8,877.52 1568.33,877.52 cw(c1574.8,833.46) 1581.28,877.52 1661.67,877.52 v1@1663.3,875.89
NetU1_71: U1.71 U3.4 | length 2038.4
  Top Layer w10: v1(1437.01,659.45) 1407.48,688.98 1407.48,734.69 1380.67,761.5 1380.67,836.92 1430.32,886.57 1464.87,886.57 1473.66,895.36 1473.66,970.78 1464.87,979.57 1413.34,979.57 1407.48,985.42 1407.48,1349.42 1482.04,1423.98 1527.77,1423.98 1540.59,1436.8 1540.59,1454.93 1540.59,1481.53 1540.59,1531.7 1524.79,1547.51 1494.82,1547.51 U3.4
  Bottom Layer w10: U1.71 906.63,500 961.07,554.45 1009.24,554.45 1130.05,675.26 1304.07,675.26 1319.89,659.45 v1(1437.01,659.45)
pads on no net: U1.0 U1.3 U1.4 U1.5 U1.7 U1.9 U1.10 U1.11 U1.12 U1.13 U1.14 U1.15 U1.17 U1.18 U1.21 U1.23 U1.24 U1.25 U1.26 U1.27 U1.28 U1.29 U1.30 U1.31 U1.32 U1.33 U1.35 U1.37 U1.38 U1.41 U1.42 U1.43 U1.44 U1.45 U1.46 U1.48 U1.49 U1.54 U1.55 U1.56 U1.57 U1.60 U1.62 U1.64 U1.65 U1.66 U1.67 U1.68 U1.69 U1.70 U1.72 U1.73 U1.74 U1.75 U1.76 U2.7 U2.9 U2.10 U2.11 U3.14 U4.3 U4.6 U4.7 U4.8 U4.9 U4.10 U4.11 U4.12 U4.16 U4.17 U4.18 U4.23 U4.24

## Polygon pours and split planes (outlines as drawn)
GND on Top Layer "GND_L01_P000" (solid, remove dead copper, pour order 0): 679.13,2234.25 2874.02,2234.25 2874.02,78.74 688.98,78.74
GND on Bottom Layer "GND_L02_P001" (solid, remove dead copper, pour order 1): 688.98,78.74 2874.02,78.74 2874.02,2253.94 679.13,2253.94

## Keep-outs
Keep-Out Layer:
  lines w78.74: 0,0 0,2300 3550,2300 3550,0 0,0

## Other copper
Top Layer:
  text "Debreczeni Laszlo A27" at 225,550 h60 r90
Bottom Layer:
  text "Debreczeni Laszlo A27" at 175,550 h60 r270

## Silkscreen, mask and mechanical layers (free items; w line width, h text height)
Top Solder:
  lines w10: 0,0 3550,0 3550,2300 0,2300 0,0

## Text inside footprints (layer, text, board x,y; h text height)
U1: Bottom Overlay "CN10" at 675,2170 h60; Bottom Overlay "CN7" at 3075,2170 h60